# Altium PCB lv_2_ac.PcbDoc
Units mm, origin at the board's own origin, x right, y up, seen from the top; angles counter-clockwise.
Board outline 83.12 x 61.01 mm, 2 copper layers (Top Layer, Bottom Layer); 55 components, 35 nets, 200 pads, 411 vias.
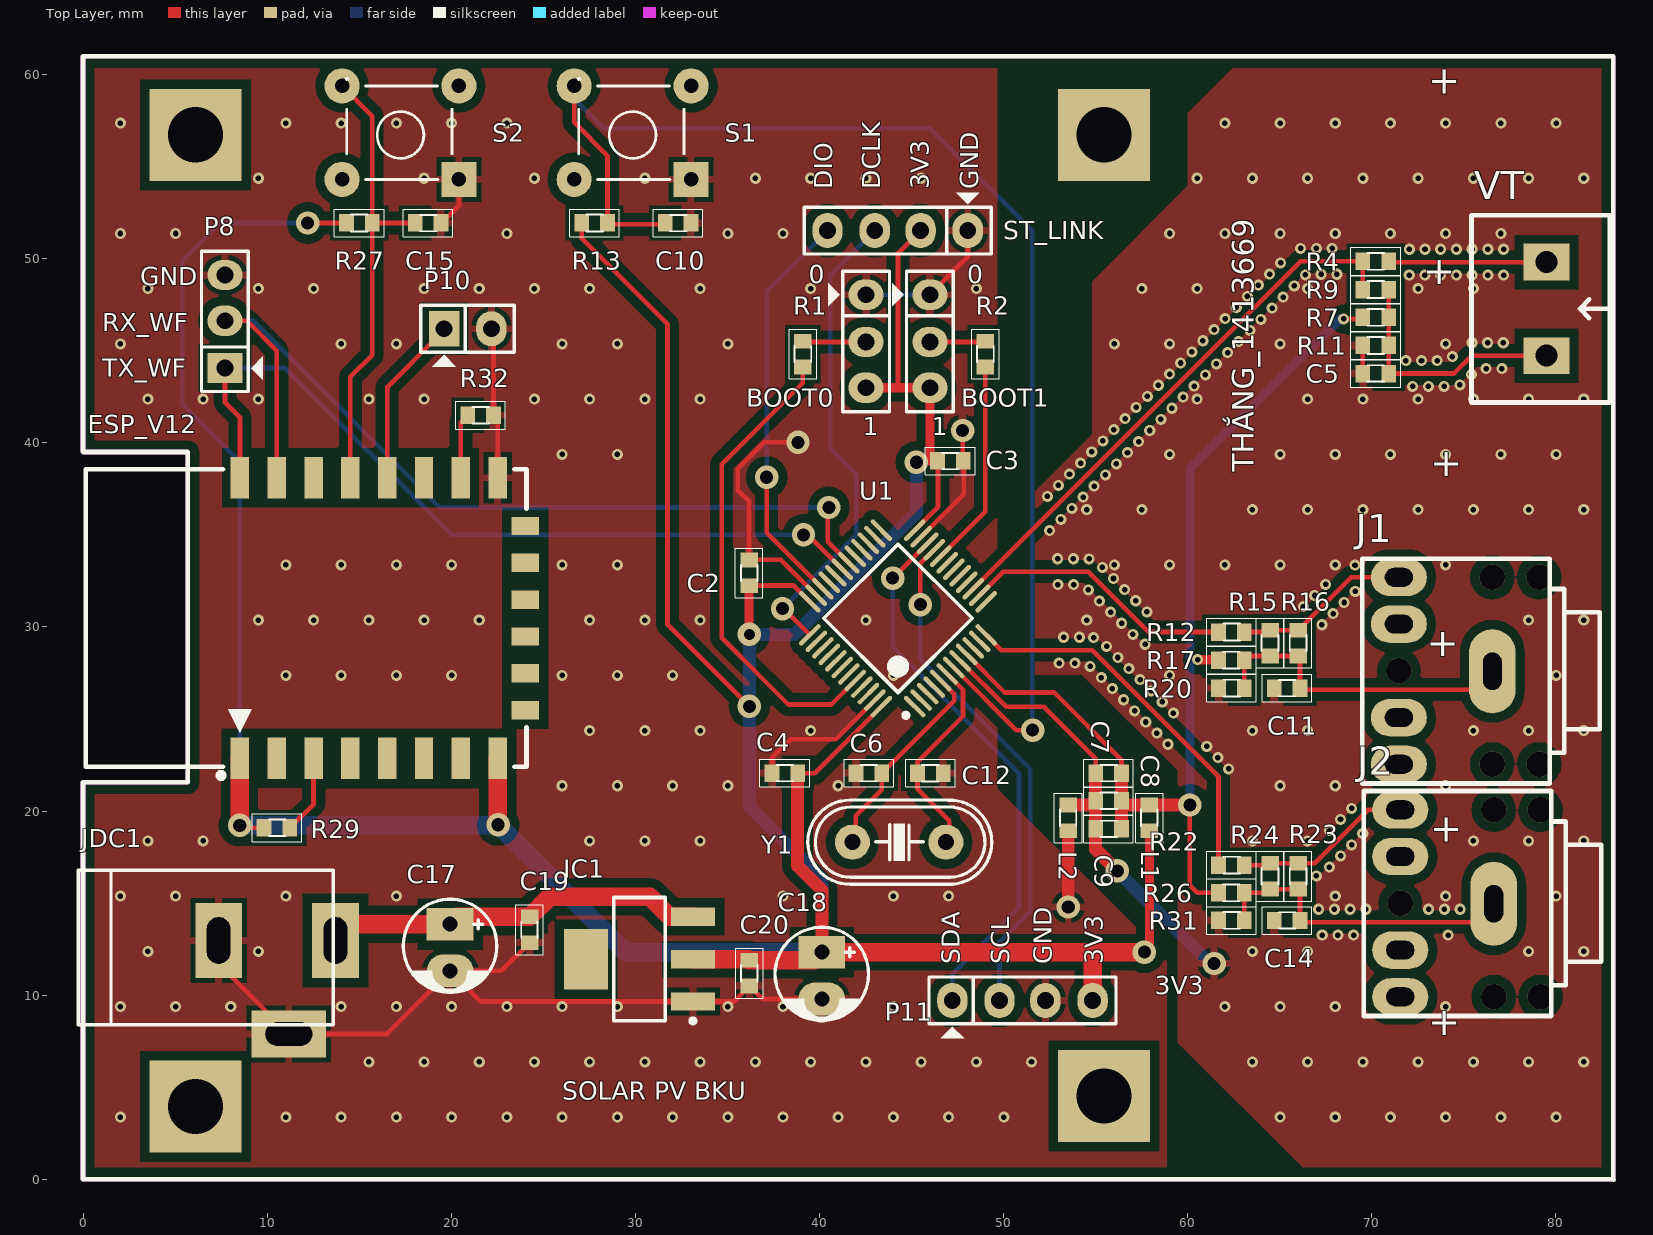
[diagram p0: Top Layer view]
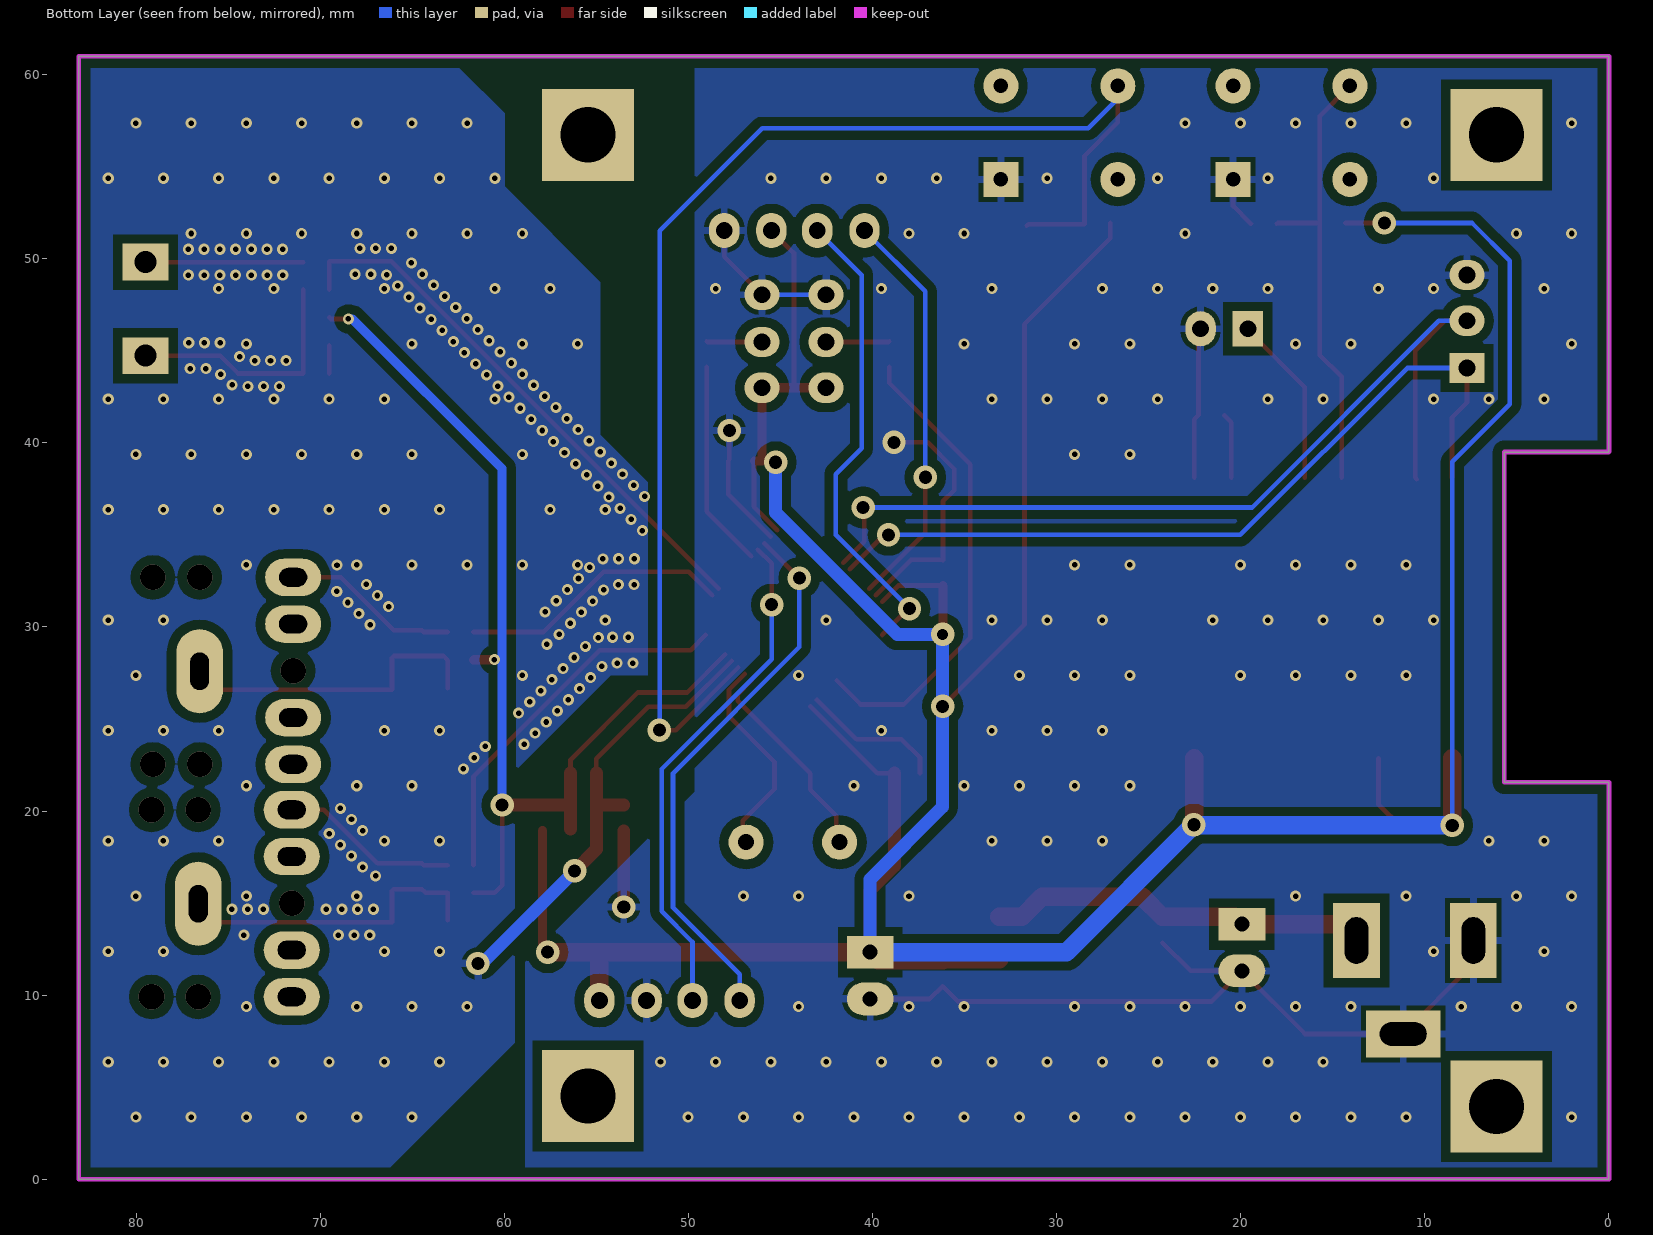
[diagram p1: Bottom Layer view, seen from below]
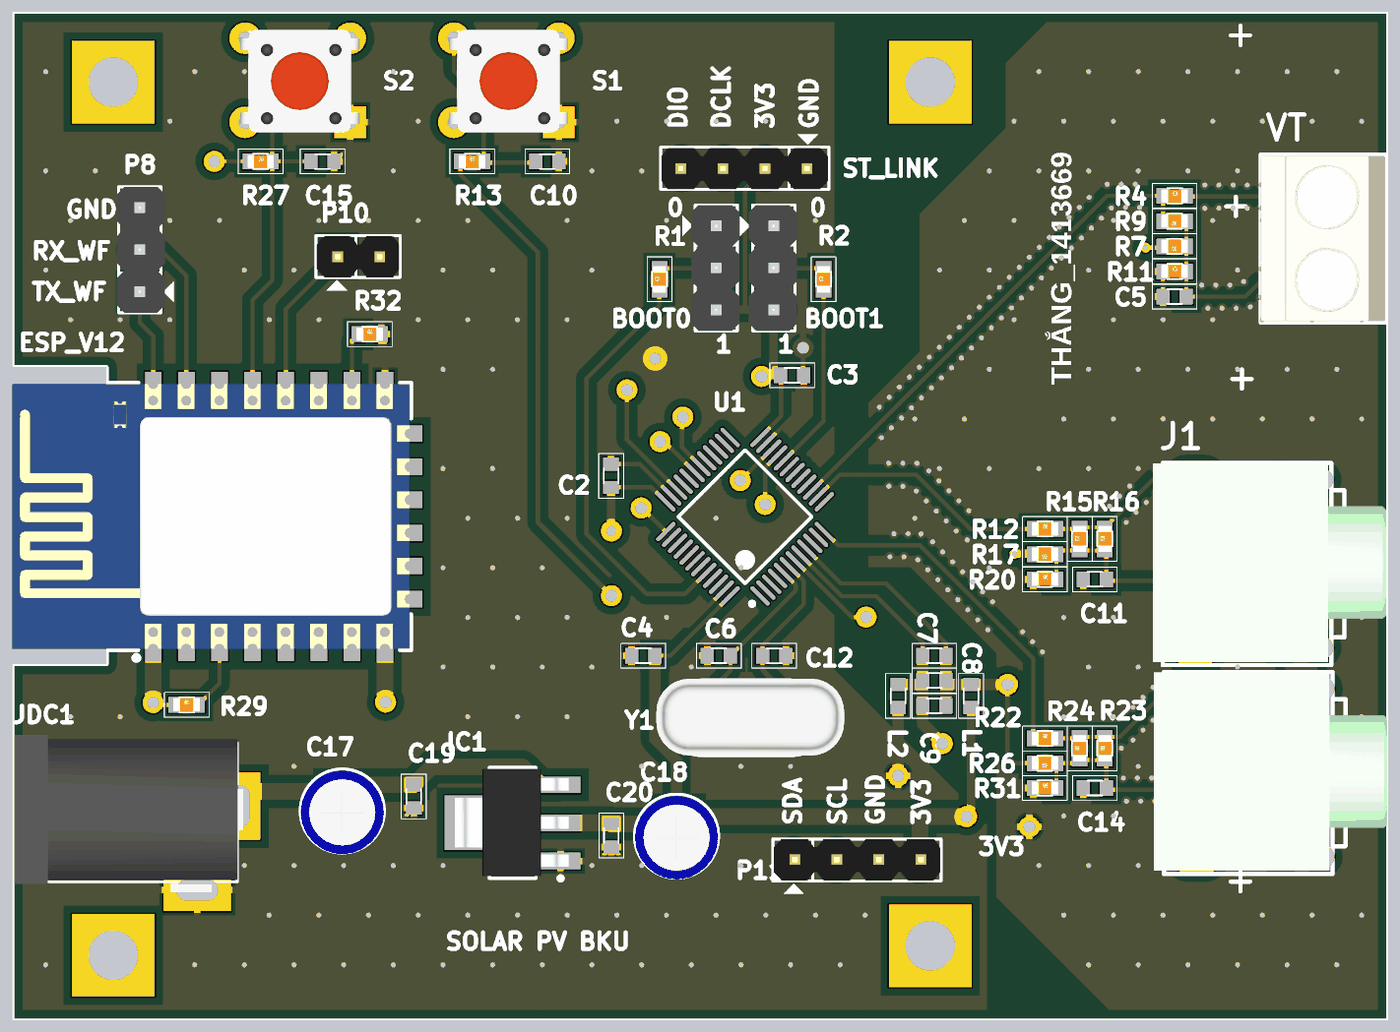
[diagram p2: 3D render of the assembled board from above, using the file's embedded part models]

## Layer stack, top to bottom
Top Solder: solder mask 0.0102, Solder Resist, Dk 3.5
Top Layer: signal copper 0.0356
Dielectric 1: dielectric 0.32, FR-4, Dk 4.8
Bottom Layer: signal copper 0.0356
Bottom Solder: solder mask 0.0102, Solder Resist, Dk 3.5

## Board outline
0,0 0,21.565 5.692,21.565 5.692,39.502 0.017,39.502 0,39.519 0,60.997 83.124,60.997 83.124,-0.01 83.114,0

## Design rules (kind name [scope] priority, off if disabled: settings)
Clearance [All] p1: gap=0.2 ignorepadtopadclearanceinfootprint=FALSE except(0: Arc-Hole Track-Hole SMDPad-Hole THPad-Hole Via-Hole Fill-Hole Poly-Hole Region-Hole Text-Hole; 0.5: Arc-Fill Arc-Poly Arc-Region Track-Fill Track-Poly Track-Region SMDPad-Fill SMDPad-Poly SMDPad-Region THPad-Fill THPad-Poly THPad-Region Via-Fill Via-Poly Via-Region Fill-Fill Fill-Poly Fill-Region Poly-Poly Poly-Region Region-Region)
PlaneConnect [All] p1: planeconnectstyle=Relief reliefexpansion=0.508 reliefentries=4 reliefconductorwidth=0.4 reliefairgap=0.254
PolygonConnect [All] p1: connectstyle=Relief reliefconductorwidth=0.4 reliefentries=4 polygonreliefangle="90 Angle" airgapwidth=0.254
RoutingVias [All] p1: holewidth=0.711 width=1.27 viastyle="Through Hole" minholewidth=0.711 minwidth=1.27 maxholewidth=0.711 maxwidth=1.27
SolderMaskExpansion [All] p1: expansion=0.102
Width [All] p1: maxlimit=1 minlimit=0.254 preferedwidth=0.254 minimp=50.000000 maximp=50.000000 favimp=50.000000
29 further rules are at their usual default settings.

## Components (designator, comment, footprint, x,y, rotation, side; value= is the part's Value field where it differs from the comment)
BOOT0 "Header 3" JP3#1 42.532,45.508 r270 top
BOOT1 "Header 3" JP3#1 46.004,45.508 r270 top
C2 "Cap" CAP-SM-0603 36.178,32.935 r270 top value=100pF
C3 "Cap" CAP-SM-0603 47.112,39.017 r180 top value=100pF
C4 "Cap" CAP-SM-0603 38.12,22.061 r0 top value=100pF
C5 "Cap Non-Pol SMD" CAP-SM-0603 70.223,43.769 r0 top value=100pF
C6 "Cap" CAP-SM-0603 42.687,22.061 r0 top value=100pF
C7 "Cap" CAP-SM-0603 55.707,22.061 r0 top value=100pF
C8 "Cap" CAP-SM-0603 55.707,20.555 r0 top value=100pF
C9 "Cap" CAP-SM-0603 55.707,19.027 r0 top value=100pF
C10 "Cap" CAP-SM-0603 32.322,51.947 r180 top value=100pF
C11 "Cap Non-Pol SMD" CAP-SM-0603 65.404,26.675 r0 top value=100pF
C12 "Cap" CAP-SM-0603 46.03,22.061 r180 top value=100pF
C14 "Cap Non-Pol SMD" CAP-SM-0603 65.404,14.055 r0 top value=100pF
C15 "Cap" CAP-SM-0603 18.744,51.947 r180 top value=100pF
C17 "10uF" CP1/2 19.937,13.859 r270 top
C18 "10uF" CP1/2 40.13,12.335 r270 top
C19 "Cap Non-Pol SMD" CAP-SM-0603 24.255,13.554 r90 top value=100pF
C20 "Cap Non-Pol SMD" CAP-SM-0603 36.193,11.192 r90 top value=100pF
ESP_V12 "ESP_V12" ESP_12_E 8.521,22.485 r90 top
IC1 "LM1117" SOT223-4N 30.224,11.954 r180 top value=LM317
J1 "Jac Phone2" JacPhone2 74.017,27.619 r270 top
J2 "Jac Phone2" JacPhone2 74.093,14.99 r270 top
JDC1 "Jack DC" DC-IN 10.539,10.43 r0 top value="Jac DC"
L1 "Inductor" CAP-SM-0603 57.928,19.627 r90 top value=10mH
L2 "Inductor" CAP-SM-0603 53.517,19.627 r90 top value=10mH
P8 "Header 3" JP3#2 7.706,46.607 r90 top
P10 "Header 2" JP2 19.615,46.201 r0 top
P11 "Header 4" JP4 49.76,9.712 r0 top
R1 "RESISTOR SMD" RES-SM-0603 39.099,44.136 r90 top value=1K
R2 "RESISTOR SMD" RES-SM-0603 49.013,44.136 r90 top value=1K
R4 "RESISTOR SMD" RES-SM-0603 69.537,49.865 r0 top value=1K
R7 "RESISTOR SMD" RES-SM-0603 70.909,46.817 r180 top value=470K
R9 "RESISTOR SMD" RES-SM-0603 70.909,48.329 r180 top value=1K
R11 "RESISTOR SMD" RES-SM-0603 69.537,45.293 r0 top value=470K
R12 "RESISTOR SMD" RES-SM-0603 61.697,29.723 r0 top value=1K
R13 "RESISTOR SMD" RES-SM-0603 27.098,51.947 r0 top value=1K
R15 "RESISTOR SMD" RES-SM-0603 64.48,28.437 r90 top value=2R
R16 "RESISTOR SMD" RES-SM-0603 66.004,28.437 r90 top value=2R
R17 "RESISTOR SMD" RES-SM-0603 63.069,28.199 r180 top value=470K
R20 "RESISTOR SMD" RES-SM-0603 61.697,26.675 r0 top value=470K
R22 "RESISTOR SMD" RES-SM-0603 61.697,17.061 r0 top value=1K
R23 "RESISTOR SMD" RES-SM-0603 66.004,15.775 r90 top value=2R
R24 "RESISTOR SMD" RES-SM-0603 64.48,15.775 r90 top value=2R
R26 "RESISTOR SMD" RES-SM-0603 63.069,15.562 r180 top value=470K
R27 "RESISTOR SMD" RES-SM-0603 14.32,51.947 r0 top value=1K
R29 "RESISTOR SMD" RES-SM-0603 9.847,19.094 r0 top value=1K
R31 "RESISTOR SMD" RES-SM-0603 61.697,14.064 r0 top value=470K
R32 "RESISTOR SMD" RES-SM-0603 20.911,41.502 r0 top value=1K
S1 "SW-PB" "Tact SW 4 pin" 33.026,54.314 r180 top
S2 "SW-PB" "Tact SW 4 pin" 20.418,54.314 r180 top
ST_LINK "Header 4" JP4 45.52,51.533 r180 top
U1 "STM32F103C8T6" STM-LQFP48_L 44.271,30.469 r135 top
VT "Domino 2" "DOMINO 2- 5mm" 79.503,47.279 r270 top
Y1 "XTAL" XT2 44.332,18.31 r180 top

## Footprints (in the part's own frame and the unit in brackets; to place one, negate y for a bottom-side part, rotate by r counter-clockwise, add the part's x,y. Pads: shape width x height; smd on the part's side, far side on the other; paste and mask are expansions set on the pad)
CAP-SM-0603 [mm] "SMD Ceramic Capacitor Size 0603"
  rect 0.8x0.95 smd: 1(-0.7,0) 2(0.7,0)
  silkscreen extent -1.35,-0.75 1.35,0.75, body extent -0.85,-0.45 0.85,0.45, height 0.6
CP1/2 [mil] "Tu hoa < 22uF/16>50V"
  rect 70x100 hole 32: 1(0,0)
  oval 70x100 hole 32: 2(100,0)
  silkscreen extent -53,-100 146,100, body extent -49,-99 149,99, height 287
DC-IN [mil] "Jac DC input"
  rect 100x160 hole 50 slot 100 at 90 deg: 1(125,100) 2(-125,100)
  rect 160x100 hole 50 slot 100 at 0 deg: 3(25,-100)
  silkscreen extent -425,-80 120,250, body extent -410,-105 134,269, height 434
"DOMINO 2- 5mm" [mm]
  rect 2x2.5 hole 1.2: 1(-2.54,0) 2(2.54,0)
  silkscreen extent -5.08,-4.08 5.08,3.43, body extent -5,-4.07 5,3.43, height 10
ESP_12_E [mm] "ESP-12 Wi-Fi Module by AI-Thinker"
  rect 2.25x1 smd: 1(0.375,0) 2(0.375,-2) 3(0.375,-4) 4(0.375,-6) 5(0.375,-8) 6(0.375,-10) 7(0.375,-12) 8(0.375,-14) 15(15.625,-14) 16(15.625,-12) 17(15.625,-10) 18(15.625,-8) 19(15.625,-6) 20(15.625,-4) 21(15.625,-2) 22(15.625,0)
  rect 1x1.5 smd: 9(3,-15.5) 10(5,-15.5) 11(7,-15.5) 12(9,-15.5) 13(11,-15.5) 14(13,-15.5)
  silkscreen extent -0.7,-15.57 16.08,8.37, body extent 0,-15.49 16,8.51, height 2.75
JacPhone2 [mil] "Jac Phone Stereo"
  oval 80x120 hole 40 slot 60 at 90 deg: 1(-200,-100) 2(-100,-100) 3(100,-100) 4(200,-100)
  oval 180x100 hole 40 slot 80 at 0 deg: 5(1,100)
  silkscreen extent -240,-178 241,330, body extent -239,-202 233,354, height 394
JP2 [mil]
  rect 65x75 hole 36: 1(0,0)
  oval 65x75 hole 36: 2(101,0)
  silkscreen extent -50,-81 150,50, body extent -48,-50 148,48, height 323
JP3#1 [mil] "Jumper 3"
  oval 65x75 hole 36: 1(-100,0) 2(1,0) 3(99,0)
  silkscreen extent -150,-81 150,50, body extent -150,-60 150,55, height 355
JP3#2 [mil] "Jumper 3"
  rect 65x75 hole 36: 1(-100,0)
  oval 65x75 hole 36: 2(1,0) 3(99,0)
  silkscreen extent -150,-81 150,50, body extent -150,-60 150,55, height 355
JP4 [mil] "Jumper 4"
  oval 65x75 hole 36: 1(-100,0) 2(1,0) 3(99,0) 4(200,0)
  silkscreen extent -150,-81 250,50, body extent -148,-48 248,50, height 323
RES-SM-0603 [mm]
  rect 0.8x0.95 smd: 1(-0.014,0) 2(1.386,0)
  silkscreen extent -0.66,-0.75 2.04,0.75, body extent -0.11,-0.4 1.49,0.4, height 0.3
SOT223-4N [mm] "SOT223, 4-Leads, Body 6.5x3.5mm, Pitch 2.3mm, Lead Span 7mm, IPC Medium Density"
  rect 2.4x1 smd: 1(-2.9,2.3) 2(-2.9,0) 3(-2.9,-2.3)
  rect 2.4x3.3 smd: 4(2.9,0)
  silkscreen extent -3.03,-3.35 1.4,3.47, body extent -3.39,-3.27 3.5,3.23, height 1.72
STM-LQFP48_L [mm] "QFP, 48-Leads, Body 7x7mm, Pitch 0.5mm, IPC High Density"
  oval 1.55x0.25 smd: 1(-4.025,2.75) 2(-4.025,2.25) 3(-4.025,1.75) 4(-4.025,1.25) 5(-4.025,0.75) 6(-4.025,0.25) 7(-4.025,-0.25) 8(-4.025,-0.75) 9(-4.025,-1.25) 10(-4.025,-1.75) 11(-4.025,-2.25) 12(-4.025,-2.75) 25(4.025,-2.75) 26(4.025,-2.25) 27(4.025,-1.75) 28(4.025,-1.25) 29(4.025,-0.75) 30(4.025,-0.25) 31(4.025,0.25) 32(4.025,0.75) 33(4.025,1.25) 34(4.025,1.75) 35(4.025,2.25) 36(4.025,2.75)
  oval 0.25x1.55 smd: 13(-2.75,-4.025) 14(-2.25,-4.025) 15(-1.75,-4.025) 16(-1.25,-4.025) 17(-0.75,-4.025) 18(-0.25,-4.025) 19(0.25,-4.025) 20(0.75,-4.025) 21(1.25,-4.025) 22(1.75,-4.025) 23(2.25,-4.025) 24(2.75,-4.025) 37(2.75,4.025) 38(2.25,4.025) 39(1.75,4.025) 40(1.25,4.025) 41(0.75,4.025) 42(0.25,4.025) 43(-0.25,4.025) 44(-0.75,4.025) 45(-1.25,4.025) 46(-1.75,4.025) 47(-2.25,4.025) 48(-2.75,4.025)
  silkscreen extent -4.15,-2.85 2.85,3.55, body extent -3.5,-3.5 3.5,3.5, height 1.6
"Tact SW 4 pin" [mil] "SW button 4pin, 250 x250 mil"
  rect 75x75 hole 31: 1(0,0)
  round 75 hole 31: 2(250,-200) 3(250,0) 4(0,-200)
  silkscreen extent 15,-215 240,0, body extent -36,-220 276,24, height 276
XT2 [mil] "Footpin for Crystal 2 pin"
  round 75 hole 34: 1(-100,0) 2(100,0)
  silkscreen extent -198,-90 195,90, body extent -233,-93 213,90, height 138

## Part data
BOOT0 BOOT1 P8: "Header, 3-Pin", LatestRevisionDate=17-Jul-2002, LatestRevisionNote="Re-released for DXP Platform.", Publisher="Altium Limited"
C2 C3 C4 C5 C6 C7 C8 C9 C10 C11 C12 C14 C15 C19 C20: "Capacitor"
  C2 C3 C4 C6 C7 C8 C9 C10 C12 C15: LatestRevisionDate=17-Jul-2002, LatestRevisionNote="Re-released for DXP Platform.", PackageDescription="Radial Cap, Thru-Hole; 2 Leads; 0.3 in Pin Spacing", PackageReference=RAD-0.3, Published=8-Jun-2000, Publisher="Altium Limited"
C17 C18: library part "Cap Pol1", "Polarized Capacitor (Radial)", LatestRevisionDate=17-Jul-2002, LatestRevisionNote="Re-released for DXP Platform.", PackageDescription="Polarized Capacitor (Radial); 2 Leads", PackageReference=RB7.6-15, Published=8-Jun-2000, Publisher="Altium Limited"
ESP_V12: library part Component_1
IC1: "Available in 1.8V, 2.5V, 2.85V, 3.3V, 5V, and  Adjustable Versions"
J1 J2: "Jac Phone Stereo", Creat by=VanDungEvn@Gmail.com
JDC1: "Jack DC input"
P10: "Header, 2-Pin", LatestRevisionDate=17-Jul-2002, LatestRevisionNote="Re-released for DXP Platform.", Publisher="Altium Limited"
P11 ST_LINK: "Header, 4-Pin", LatestRevisionDate=17-Jul-2002, LatestRevisionNote="Re-released for DXP Platform.", Publisher="Altium Limited"
R1 R2 R4 R7 R9 R11 R12 R13 R15 R16 R17 R20 R22 R23 R24 R26 R27 R29 R31 R32: "Resistor"
S1 S2: "Switch", LatestRevisionDate=17-Jul-2002, LatestRevisionNote="Re-released for DXP Platform.", PackageDescription="Switch; 2 Leads", PackageReference=SPST-2, Published=24-Mar-1999, Publisher="Altium Limited"
U1: "ARM Cortex-M3 32-bit MCU, 64 KB Flash, 20 KB Internal RAM, 37 I/Os, 48-pin LQFP, -40 to 85 degC, Tray", I/Os (High Current)=37, Operating Frequency(F) (Processor speed) (MHz)=72, Supplier Part Number 1=497-6063-ND, Supply Voltage(Vcc) min (V)=2, A/D Converter="2x12-bit (10 Channel)", ComponentLink1Description="Manufacturer URL", ComponentLink1URL=http://www.st.com/web/en/home.html, ComponentLink2Description=Datasheet, ComponentLink2URL=http://www.st.com/st-web-ui/static/active/en/resource/technical/document/datasheet/CD00161566.pdf, ComponentLink3Description="Package Specification", ComponentLink3URL=http://www.st.com/st-web-ui/static/active/en/resource/technical/document/datasheet/DM00058181.pdf, Core="ARM Cortex-M3", DatasheetVersion="Rev. 16", FLASH Size (Prog) (kB)=64, Internal RAM Size (kB)=20, Mounting Technology="Surface Mount", PackageDescription="48-Pin Low Profile Quad Flat Package, 7 x 7 mm Body, 0.5 mm Pitch", PackageReference=LQFP48, PackageVersion="Rev. 6, 06/2013", Packing=Tray, PartNumber=STM32F103C8T6, Supplier 1=Digi-Key, Supplier 2=Farnell, Supplier 3=Newark, Supplier 4=Newark, Supplier 5=Mouser, Supplier Part Number 2=1447637, Supplier Part Number 3=59M2182, Supplier Part Number 4=57P1222, Supplier Part Number 5=511-STM32F103C8T6
VT: "Domino, 2-Pin", LatestRevisionDate=17-Jul-2002, LatestRevisionNote="Re-released for DXP Platform.", Publisher="Altium Limited"
Y1: "Crystal Oscillator", LatestRevisionDate=17-Jul-2002, LatestRevisionNote="Re-released for DXP Platform.", PackageDescription="Crystal, Thru-Hole; 2 Leads; Body 3.1 x 8.2 mm (Dia.xH)", PackageReference=R38, Published=8-Jun-2000, Publisher="Altium Limited"
L1 L2: Code_IEC=1005, Code_JEITA=0402, LatestRevisionDate=29-May-2009, LatestRevisionNote="IPC-7351 Footprint Added.", PackageDescription="Chip Inductor", PackageReference=0402-A, Published=8-Jun-2000, Publisher="Altium Limited"

## Free pads (board coordinates)
  rect 5x5 hole 3: 1(6.101,3.952) 1(6.101,56.738) 1(55.453,4.524) 1(55.453,56.738)

## Via types
v1: diameter 0.6, hole 0.3, Top Layer to Bottom Layer, tented both sides, 379 vias
v2: diameter 1.27, hole 0.711, Top Layer to Bottom Layer, 18 vias
v3: diameter 1.397, hole 1.397, Top Layer to Bottom Layer, 10 vias
v4: diameter 0.6, hole 0.3, Top Layer to Bottom Layer, 2 vias
v5: diameter 1.27, hole 0.711, Top Layer to Bottom Layer, tented both sides, 1 vias
v6: diameter 1.27, hole 0.6, Top Layer to Bottom Layer, 1 vias

## Nets (pads, with @x,y where several pads share a name; then routed paths per layer and width w, separated by ;. In a path a pad name is that pad's centre, name@x,y a point inside that pad or via, vN(x,y) a via of type N, cw(c..) or ccw(c..) an arc to the next point about the centre after c; other vN are vias at no path point)
3V3: BOOT0.3 BOOT1.3 C2.2 C3.2 C4.2 C18.1 C20.2 ESP_V12.1 ESP_V12.8 IC1.2 L1.1 P11.4 R13.1 R27.1 R29.1 ST_LINK.2 U1.24 U1.36 U1.48 | length 226.2
  Top Layer w0.254: v2(8.51,19.222) 8.639,19.094 R29.1 ; v2(12.199,51.947) R27.1 ; R13.1 27.083,51.108 31.751,46.44 31.751,30.134 v2(36.196,25.689) ; C20.2@36.131,11.954 C20.2 ; v6@36.178,29.619 v6(36.196,29.6) ; C2.2@36.207,32.249 38.602,32.249 U1.36 ; C4.2 39.752,22.061 U1.48 ; 44.273,42.994 44.273,50.312 ST_LINK.2 ; U1.24 46.444,36.531 C3.2@46.444,39.017 ; v2(57.653,12.335) v2@57.928,12.61
  Top Layer w0.5: v6@36.178,29.619 C2.2 ; BOOT0.3 44.273,42.994 BOOT1.3 46.004,39.017 C3.2 ; v2@57.928,12.61 L1.1
  Top Layer w0.7: C4.2 38.82,17.02 40.13,15.709 C18.1
  Top Layer w1: v2(8.51,19.222) ESP_V12.1 ; ESP_V12.8 22.521,19.285 v2(22.55,19.256) ; IC1.2 C20.2@36.131,11.954 ; C20.2 39.687,11.892 C18.1 54.764,12.335 ; P11.4 54.84,12.258 54.764,12.335 ; v2(57.653,12.335) 54.764,12.335
  Bottom Layer w0.254: v2(8.51,19.222) 8.51,38.973 5.386,42.097 5.386,49.895 7.438,51.947 v2(12.199,51.947)
  Bottom Layer w0.7: C18.1 40.13,16.294 36.196,20.228 v2(36.196,25.689) v6(36.196,29.6) 38.66,29.6 45.264,36.204 v2(45.264,38.947)
  Bottom Layer w1: v2(8.51,19.222) 22.515,19.222 v2(22.55,19.256) 29.472,12.335 C18.1
5V: C17.1 C19.2 IC1.3 JDC1.1 | length 20.8
  Top Layer w0.254: JDC1.1 JDC1.1@14.603,13.859 ; C17.1 C17.1@20.332,14.254
  Top Layer w1: JDC1.1@14.603,13.859 C17.1 ; C17.1@20.332,14.254 C19.2 25.351,15.349 30.788,15.349 31.883,14.254 IC1.3
A1: U1.11
A2: R22.1 U1.12 | length 20.6
  Top Layer w0.254: U1.12 49.889,28.74 54.819,28.74 61.683,21.876 R22.1
A3: U1.13
A4: R12.1 U1.14 | length 14.9
  Top Layer w0.254: U1.14 49.988,33.004 54.612,33.004 57.893,29.723 R12.1
A5: R4.1 R9.2 U1.15 | length 30.1
  Top Layer w0.254: U1.15 66.142,49.865 R4.1 R9.2
A6: U1.16
A7: U1.17
BOOT0: R1.1 U1.44 | length 25.8
  Top Layer w0.254: R1.1 39.099,43.255 34.692,38.847 34.692,29.403 38.305,25.79 40.653,25.79 U1.44
BOOT1: R2.1 U1.20 | length 11.3
  Top Layer w0.254: U1.20 49.013,36.272 R2.1
BUT_CONF: C15.2 ESP_V12.19 R27.2 S2.2 | length 24.8
  Top Layer w0.254: S2.2 15.706,57.756 R27.2 ; ESP_V12.19 14.521,43.584 15.706,44.769 R27.2 ; C15.2@18.044,51.898 17.995,51.947 R27.2
DCLK: ST_LINK.3 U1.37 | length 25.9
  Top Layer w0.254: v2(37.993,30.993) 38.054,30.993 U1.37
  Bottom Layer w0.254: v2(37.993,30.993) 41.999,34.999 41.999,38.301 40.59,39.709 40.59,49.118 ST_LINK.3
DIO: ST_LINK.4 U1.34 | length 22.1
  Top Layer w0.254: v2(37.136,38.135) 37.136,35.129 U1.34
  Bottom Layer w0.254: v2(37.136,38.135) 37.136,48.229 ST_LINK.4
GND: BOOT0.1 BOOT1.1 C2.1 C3.1 C4.1 C6.1 C10.1 C12.1 C15.1 C17.2 C18.2 C19.1 C20.1 ESP_V12.15 IC1.1 JDC1.2 JDC1.3 L2.1 P8.3 P10.2 P11.3 R32.2 S1.1 S2.1 ST_LINK.1 U1.23 U1.35 U1.47 | length 94.1
  Top Layer w0.254: JDC1.2 7.364,11.7 JDC1.3 16.508,7.89 C17.2 ; C15.1@19.444,51.898 20.418,52.871 S2.1 ; P10.2@22.398,45.984 22.296,45.882 R32.2 22.521,41.278 ESP_V12.15 ; C19.1 22.72,11.319 C17.2 ; C2.1 C2.1@36.178,33.649 ; C4.1 37.42,22.888 38.432,23.9 40.884,23.9 U1.47 ; v2(38.837,40.03) 37.008,40.03 35.56,38.583 35.56,37.44 36.178,36.822 C2.1@36.178,33.649 ; U1.35 37.909,33.649 C2.1@36.178,33.649 ; C18.2 36.89,9.795 C20.1 35.355,9.654 IC1.1 21.602,9.654 C17.2 ; U1.23 47.841,37.221 47.841,39.017 47.778,39.081 v5(47.778,40.675) ; BOOT1.1 48.06,50.104 ST_LINK.1
  Top Layer w0.7: v2(53.517,14.79) L2.1
  Bottom Layer w0.254: BOOT0.1 BOOT1.1
  other v1: 2.022,3.376 11.022,3.376 14.022,3.376 17.022,3.376 20.022,3.376 23.022,3.376 26.022,3.376 29.022,3.376 32.022,3.376 35.022,3.376 38.022,3.376 41.022,3.376 44.022,3.376 47.022,3.376 50.022,3.376 15.522,6.376 18.522,6.376 21.522,6.376 24.522,6.376 27.522,6.376 30.522,6.376 33.522,6.376 36.522,6.376 39.522,6.376 42.522,6.376 45.522,6.376 48.522,6.376 51.522,6.376 2.022,9.376 5.022,9.376 8.022,9.376 14.022,9.376 17.022,9.376 20.022,9.376 23.022,9.376 26.022,9.376 29.022,9.376 35.022,9.376 38.022,9.376 44.022,9.376 3.522,12.376 9.522,12.376 2.022,15.376 5.022,15.376 11.022,15.376 17.022,15.376 38.022,15.376 44.022,15.376 47.022,15.376 3.522,18.376 6.522,18.376 27.522,18.376 30.522,18.376 33.522,18.376 26.022,21.376 29.022,21.376 32.022,21.376 35.022,21.376 41.022,21.376 27.522,24.376 30.522,24.376 33.522,24.376 39.522,24.376 11.022,27.376 14.022,27.376 17.022,27.376 20.022,27.376 26.022,27.376 29.022,27.376 32.022,27.376 44.022,27.376 9.522,30.376 12.522,30.376 15.522,30.376 18.522,30.376 21.522,30.376 27.522,30.376 30.522,30.376 33.522,30.376 42.522,30.376 11.022,33.376 14.022,33.376 17.022,33.376 20.022,33.376 26.022,33.376 29.022,33.376 26.022,39.376 29.022,39.376 3.522,42.376 6.522,42.376 9.522,42.376 15.522,42.376 18.522,42.376 24.522,42.376 27.522,42.376 30.522,42.376 33.522,42.376 2.022,45.376 14.022,45.376 17.022,45.376 26.022,45.376 29.022,45.376 35.022,45.376 3.522,48.376 9.522,48.376 12.522,48.376 18.522,48.376 21.522,48.376 24.522,48.376 27.522,48.376 33.522,48.376 39.522,48.376 48.522,48.376 2.022,51.376 5.022,51.376 23.022,51.376 35.022,51.376 38.022,51.376 9.522,54.376 18.522,54.376 24.522,54.376 30.522,54.376 36.522,54.376 39.522,54.376 42.522,54.376 45.522,54.376 2.022,57.376 11.022,57.376 14.022,57.376 17.022,57.376 20.022,57.376 23.022,57.376
NetBOOT0_2: BOOT0.2 R1.2 | length 3.4
  Top Layer w0.254: R1.2 39.138,45.483 BOOT0.2
NetBOOT1_2: BOOT1.2 R2.2 | length 3
  Top Layer w0.254: BOOT1.2 48.975,45.483 R2.2
NetC5_2: C5.2 R7.1 R9.1 R11.2 VT.2 | length 13.5
  Top Layer w0.254: R9.1 R7.1 R11.2 C5.2 74.47,43.769 75.439,44.739 VT.2
NetC6_2: C6.2 U1.5 Y1.2 | length 11.3
  Top Layer w0.254: Y1.2@41.968,18.311 41.968,19.751 43.387,21.169 C6.2 47.326,26 47.326,26.353 U1.5
NetC10_2: C10.2 R13.2 S1.2 U1.7 | length 72.8
  Top Layer w0.254: S1.2 26.676,57.413 28.483,55.606 R13.2 28.483,51.872 31.547,51.872 C10.2@31.622,51.797 ; U1.7 50.696,24.398 v2(51.58,24.398)
  Bottom Layer w0.254: S1.2 26.676,58.699 28.285,57.09 45.997,57.09 51.565,51.523 51.565,24.414 v2(51.58,24.398)
NetC11_2: C11.2 J1.5 R15.1 R16.1 R17.1 R20.2 | length 17.3
  Top Layer w0.254: R20.2 R17.1 63.307,28.423 R15.1 R16.1 66.104,28.323 C11.2 66.104,26.594 75.557,26.594 J1.5
NetC12_2: C12.2 U1.6 Y1.1 | length 11.2
  Top Layer w0.254: U1.6 47.8,26.586 47.8,25.152 45.33,22.682 C12.2 45.33,21.195 47.048,19.478 Y1.1@47.048,18.311
NetC14_2: C14.2 J2.5 R23.1 R24.1 R26.1 R31.2 | length 17.3
  Top Layer w0.254: R31.2 R26.1 64.281,15.562 R24.1 R23.1 66.104,15.661 C14.2 66.104,13.965 75.633,13.965 J2.5
NetESP_V12_3: ESP_V12.3 R29.2 | length 4.3
  Top Layer w0.254: R29.2 12.521,20.381 ESP_V12.3
NetESP_V12_16: ESP_V12.16 R32.1 | length 3.5
  Top Layer w0.254: ESP_V12.16 20.521,41.126 R32.1
NetESP_V12_18: ESP_V12.18 P10.1 | length 9.3
  Top Layer w0.254: ESP_V12.18 16.521,43.035 19.348,45.862 P10.1@19.71,45.862
NetJ1_1: J1.1 R12.2 R15.2 R16.2 | length 9.6
  Top Layer w0.254: R12.2 64.38,29.723 R15.2 R16.2 68.88,32.699 J1.1
NetJ2_1: J2.1 R22.2 R23.2 R24.2 | length 9.7
  Top Layer w0.254: R22.2 64.38,17.061 R24.2 R23.2 66.913,17.161 69.822,20.07 J2.1
NetR4_2: R4.2 VT.1 | length 8.6
  Top Layer w0.254: R4.2@70.923,49.819 VT.1
RX_MCU: ESP_V12.22 P8.1 U1.31 | length 44.4
  Top Layer w0.254: P8.1 7.706,42.201 8.521,41.386 ESP_V12.22 ; v2(39.136,35.005) 39.136,34.875 39.512,34.875 U1.31
  Bottom Layer w0.254: P8.1 10.961,44.067 20.024,35.005 v2(39.136,35.005)
SCL: P11.2 U1.21 | length 28
  Top Layer w0.254: v2(45.485,31.213) 45.485,33.451 U1.21
  Bottom Layer w0.254: v2(45.485,31.213) 45.485,28.256 51.457,22.284 51.457,14.559 49.785,12.887 P11.2
SDA: P11.1 U1.22 | length 30
  Top Layer w0.254: v2(43.98,32.653) U1.22
  Bottom Layer w0.254: v2(43.98,32.653) 43.98,28.913 50.84,22.053 50.84,14.755 47.22,11.134 P11.1
TX_MCU: ESP_V12.21 P8.2 U1.30 | length 51
  Top Layer w0.254: P8.2 8.904,46.633 10.521,45.016 ESP_V12.21 ESP_V12.21@10.441,38.03 ; v2(40.511,36.491) 40.455,36.435 40.455,34.639 U1.30
  Bottom Layer w0.254: P8.2 9.24,46.633 19.382,36.491 v2(40.511,36.491)
VDDA: C7.2 C8.2 C9.2 L1.2 R7.2 R17.2 R26.2 U1.9 | length 56.9
  Top Layer w0.254: U1.9 50.067,26.44 52.755,26.44 56.407,22.789 C7.2 ; C8.2 C8.2@56.634,20.327 ; v2(60.125,20.327) 60.125,15.963 60.526,15.562 R26.2 ; v4(68.471,46.732) 69.438,46.732 R7.2
  Top Layer w0.5: v4(60.549,28.223) 61.659,28.223 R17.2
  Top Layer w0.7: C9.2 C8.2 C7.2 ; C8.2@56.634,20.327 L1.2 v2(60.125,20.327)
  Bottom Layer w0.5: v2@60.379,20.327 v2(60.125,20.327) 60.125,38.617 60.148,38.617 68.263,46.732 v4(68.471,46.732)
VSSA: C5.1 C7.1 C8.1 C9.1 C11.1 C14.1 L2.2 R11.1 R20.1 R31.1 U1.8 | length 26.6
  Top Layer w0.254: U1.8 50.142,25.659 52.187,25.659 55.007,22.839 C7.1 ; C8.1@54.779,20.327 C8.1 ; C5.1 R11.1
  Top Layer w0.7: L2.2 C8.1@54.779,20.327 ; C7.1 C8.1 C9.1 55.007,17.927 v2(56.186,16.748)
  Bottom Layer w0.7: v2(56.186,16.748) 61.215,11.719 v2(61.444,11.719)
  other v1: 65.022,3.376 68.022,3.376 71.022,3.376 74.022,3.376 77.022,3.376 80.022,3.376 63.522,6.376 66.522,6.376 69.522,6.376 72.522,6.376 75.522,6.376 78.522,6.376 81.522,6.376 62.022,9.376 65.022,9.376 68.022,9.376 74.022,9.376 63.522,12.376 66.522,12.376 78.522,12.376 81.522,12.376 67.317,13.262 68.171,13.262 69.025,13.262 74.149,13.262 67.121,14.667 67.975,14.667 68.829,14.667 69.683,14.667 73.099,14.667 73.953,14.667 74.807,14.667 68.022,15.376 74.022,15.376 80.022,15.376 67.001,16.476 67.705,16.959 68.309,17.563 68.912,18.167 63.522,18.376 66.522,18.376 75.522,18.376 78.522,18.376 81.522,18.376 69.516,18.771 67.703,18.944 68.307,19.548 68.911,20.151 65.022,21.376 68.022,21.376 74.022,21.376 62.234,22.29 61.644,22.908 61.041,23.512 58.935,23.631 58.331,24.235 63.522,24.376 66.522,24.376 75.522,24.376 78.522,24.376 81.522,24.376 57.727,24.838 59.229,25.323 57.123,25.442 58.625,25.927 56.519,26.046 58.021,26.531 55.916,26.65 57.417,27.135 55.312,27.254 59.022,27.376 80.022,27.376 56.813,27.739 54.708,27.858 53.019,28.038 53.873,28.038 56.21,28.343 55.606,28.946 57.688,29.062 54.899,29.426 53.264,29.443 54.118,29.443 57.024,29.599 67.297,30.122 56.42,30.203 54.522,30.376 78.522,30.376 81.522,30.376 67.9,30.726 55.817,30.807 57.788,30.822 66.294,31.106 68.504,31.33 55.213,31.41 57.184,31.426 66.898,31.71 69.108,31.934 54.609,32.014 56.58,32.029 52.951,32.302 53.805,32.302 67.502,32.314 55.976,32.633 55.372,33.237 69.095,33.359 56.022,33.376 59.022,33.376 62.022,33.376 65.022,33.376 68.022,33.376 74.022,33.376 54.653,33.698 52.945,33.706 53.799,33.706 52.51,35.239 53.113,35.843 54.522,36.376 57.522,36.376 63.522,36.376 66.522,36.376 69.522,36.376 72.522,36.376 75.522,36.376 78.522,36.376 81.522,36.376 53.717,36.447 54.321,37.051 52.378,37.094 54.925,37.655 52.982,37.698 55.529,38.259 53.586,38.302 56.133,38.862 54.19,38.906 59.022,39.376 65.022,39.376 68.022,39.376 71.022,39.376 74.022,39.376 77.022,39.376 80.022,39.376 56.737,39.466 54.793,39.51 57.34,40.07 55.397,40.113 57.944,40.674 56.001,40.717 58.548,41.278 56.605,41.321 59.152,41.882 57.209,41.925 60.522,42.376 66.522,42.376 69.522,42.376 72.522,42.376 75.522,42.376 78.522,42.376 81.522,42.376 59.756,42.486 57.813,42.529 72.229,43.067 73.083,43.067 73.937,43.067 60.36,43.09 58.417,43.133 74.787,43.153 60.964,43.693 75.42,43.726 59.021,43.737 76.216,44.036 77.07,44.036 61.568,44.297 59.624,44.341 71.853,44.472 72.707,44.472 73.561,44.472 74.389,44.682 62.171,44.901 60.228,44.944 56.022,45.376 59.022,45.376 65.022,45.376 74.022,45.376 75.439,45.441 76.293,45.441 77.147,45.441 62.775,45.505 60.832,45.548 63.379,46.109 61.436,46.152 63.983,46.713 62.04,46.756 64.587,47.317 62.644,47.36 65.191,47.92 63.248,47.964 57.522,48.376 60.522,48.376 66.522,48.376 72.522,48.376 75.522,48.376 65.795,48.524 63.851,48.568 72.041,49.116 72.895,49.116 73.749,49.116 74.603,49.116 75.457,49.116 76.311,49.116 77.165,49.116 66.399,49.128 67.252,49.163 68.106,49.163 64.455,49.171 65.059,49.775 72.043,50.521 72.897,50.521 73.751,50.521 74.605,50.521 75.459,50.521 76.313,50.521 77.167,50.521 66.142,50.568 66.996,50.568 67.85,50.568 59.022,51.376 62.022,51.376 65.022,51.376 68.022,51.376 71.022,51.376 74.022,51.376 77.022,51.376 60.522,54.376 63.522,54.376 66.522,54.376 69.522,54.376 72.522,54.376 75.522,54.376 78.522,54.376 81.522,54.376 62.022,57.376 65.022,57.376 68.022,57.376 71.022,57.376 74.022,57.376 77.022,57.376 80.022,57.376
pads on no net: ESP_V12.2 ESP_V12.4 ESP_V12.5 ESP_V12.6 ESP_V12.7 ESP_V12.9 ESP_V12.10 ESP_V12.11 ESP_V12.12 ESP_V12.13 ESP_V12.14 ESP_V12.17 ESP_V12.20 IC1.4 J1.2 J1.3 J1.4 J2.2 J2.3 J2.4 S1.3 S1.4 S2.3 S2.4 U1.1 U1.2 U1.3 U1.4 U1.10 U1.18 U1.19 U1.25 U1.26 U1.27 U1.28 U1.29 U1.32 U1.33 U1.38 U1.39 U1.40 U1.41 U1.42 U1.43 U1.45 U1.46
copper on no net:
  other v3: 76.633,9.91 79.173,9.91 71.553,14.99 76.633,20.07 79.173,20.07 76.557,22.539 79.097,22.539 71.477,27.619 76.557,32.699 79.097,32.699

## Polygon pours and split planes (outlines as drawn)
VSSA on Top Layer "Top Layer-VSSA" (solid, pour order 2): 83.11,60.893 83.008,60.995 63.095,60.995 60.021,57.921 60.021,53.959 54.814,48.752 54.814,40.471 51.716,37.373 51.716,27.416 54.256,27.416 59.463,22.209 59.463,7.426 66.778,0.111 83.11,0.111
GND on Top Layer "Top Layer-GND" (solid, pour order 6): 49.658,60.995 49.658,21.218 58.878,11.998 58.878,0.085 58.853,0.06 0.001,0.06 0.001,21.447 -0.075,21.523 5.843,21.523 5.843,39.557 0.077,39.557 0.077,61.02 0.001,61.096
no net on Top Layer "Top Layer-No Net" (solid, pour order 0): 83.11,60.893
VSSA on Bottom Layer "Bottom Layer-VSSA" (solid, pour order 4): 83.08,60.868 82.978,60.969 63.065,60.969 59.991,57.896 59.991,53.933 54.784,48.726 54.784,40.446 51.685,37.347 51.685,27.39 54.225,27.39 59.432,22.183 59.432,7.401 66.748,0.085 83.08,0.085
GND on Bottom Layer "Bottom Layer-GND" (solid, pour order 8): 49.658,60.995 49.658,21.04 58.878,11.82 58.878,0.085 58.853,0.06 0.001,0.06 0.001,21.447 -0.075,21.523 5.843,21.523 5.843,39.557 0.077,39.557 0.077,61.02 0.001,61.096

## Keep-outs
Keep-Out Layer:
  the board outline again, w0.254

## Silkscreen, mask and mechanical layers (free items; w line width, h text height)
Top Overlay:
  lines w0.254: 83.124,-0.01 83.124,60.997 0,60.997 0,39.519 0.017,39.502 5.692,39.502 5.692,21.565 0,21.565 0,0 83.114,0 83.144,-0.03
  text "+" at 73.084,58.976 h1.52
  text "DIO" at 40.692,53.781 h1 r90
  text "DCLK" at 43.308,53.781 h1 r90
  text "3V3" at 45.952,53.781 h1 r90
  text "GND" at 48.617,53.781 h1 r90
  text "0" at 39.411,48.676 h1
  text "0" at 48.022,48.676 h1
  text "+" at 72.807,48.632 h1.52
  text "GND" at 3.1,48.574 h1
  text "RX_WF" at 1.043,46.059 h1
  text "TX_WF" at 1.043,43.596 h1
  text "1" at 42.343,40.421 h1
  text "1" at 46.102,40.421 h1
  text "THẮNG_1413669" at 63.983,38.43 h2 r90
  text "+" at 73.176,38.196 h1.52
  text "+" at 72.992,28.406 h1.52
  text "+" at 73.176,18.339 h1.52
  text "SDA" at 47.625,11.684 h1 r90
  text "SCL" at 50.317,11.684 h1 r90
  text "GND" at 52.629,11.684 h1 r90
  text "3V3" at 55.397,11.684 h1 r90
  text "3V3" at 58.218,10.042 h1
  text "+" at 73.084,7.811 h1.52
  text "SOLAR PV BKU" at 26.035,4.318 h1

## Text inside footprints (layer, text, board x,y; h text height)
ESP_V12: Mechanical 13 "CUTOUT POLYGON" at 1.155,22.612 h0.25 r90; Mechanical 13 "ANTENNA AREA" at 0.647,22.612 h0.25 r90